# Altium PCB lab04.PcbDoc
Units mil, origin at the board's own origin, x right, y up, seen from the top; angles counter-clockwise.
Board outline 1387.8 x 1387.8 mil, 2 copper layers (Top Layer, Top, Bottom Layer, Bottom); 6 components, 8 nets, 26 pads, 0 vias.
Unrouted connection lines stored in the file: 1.
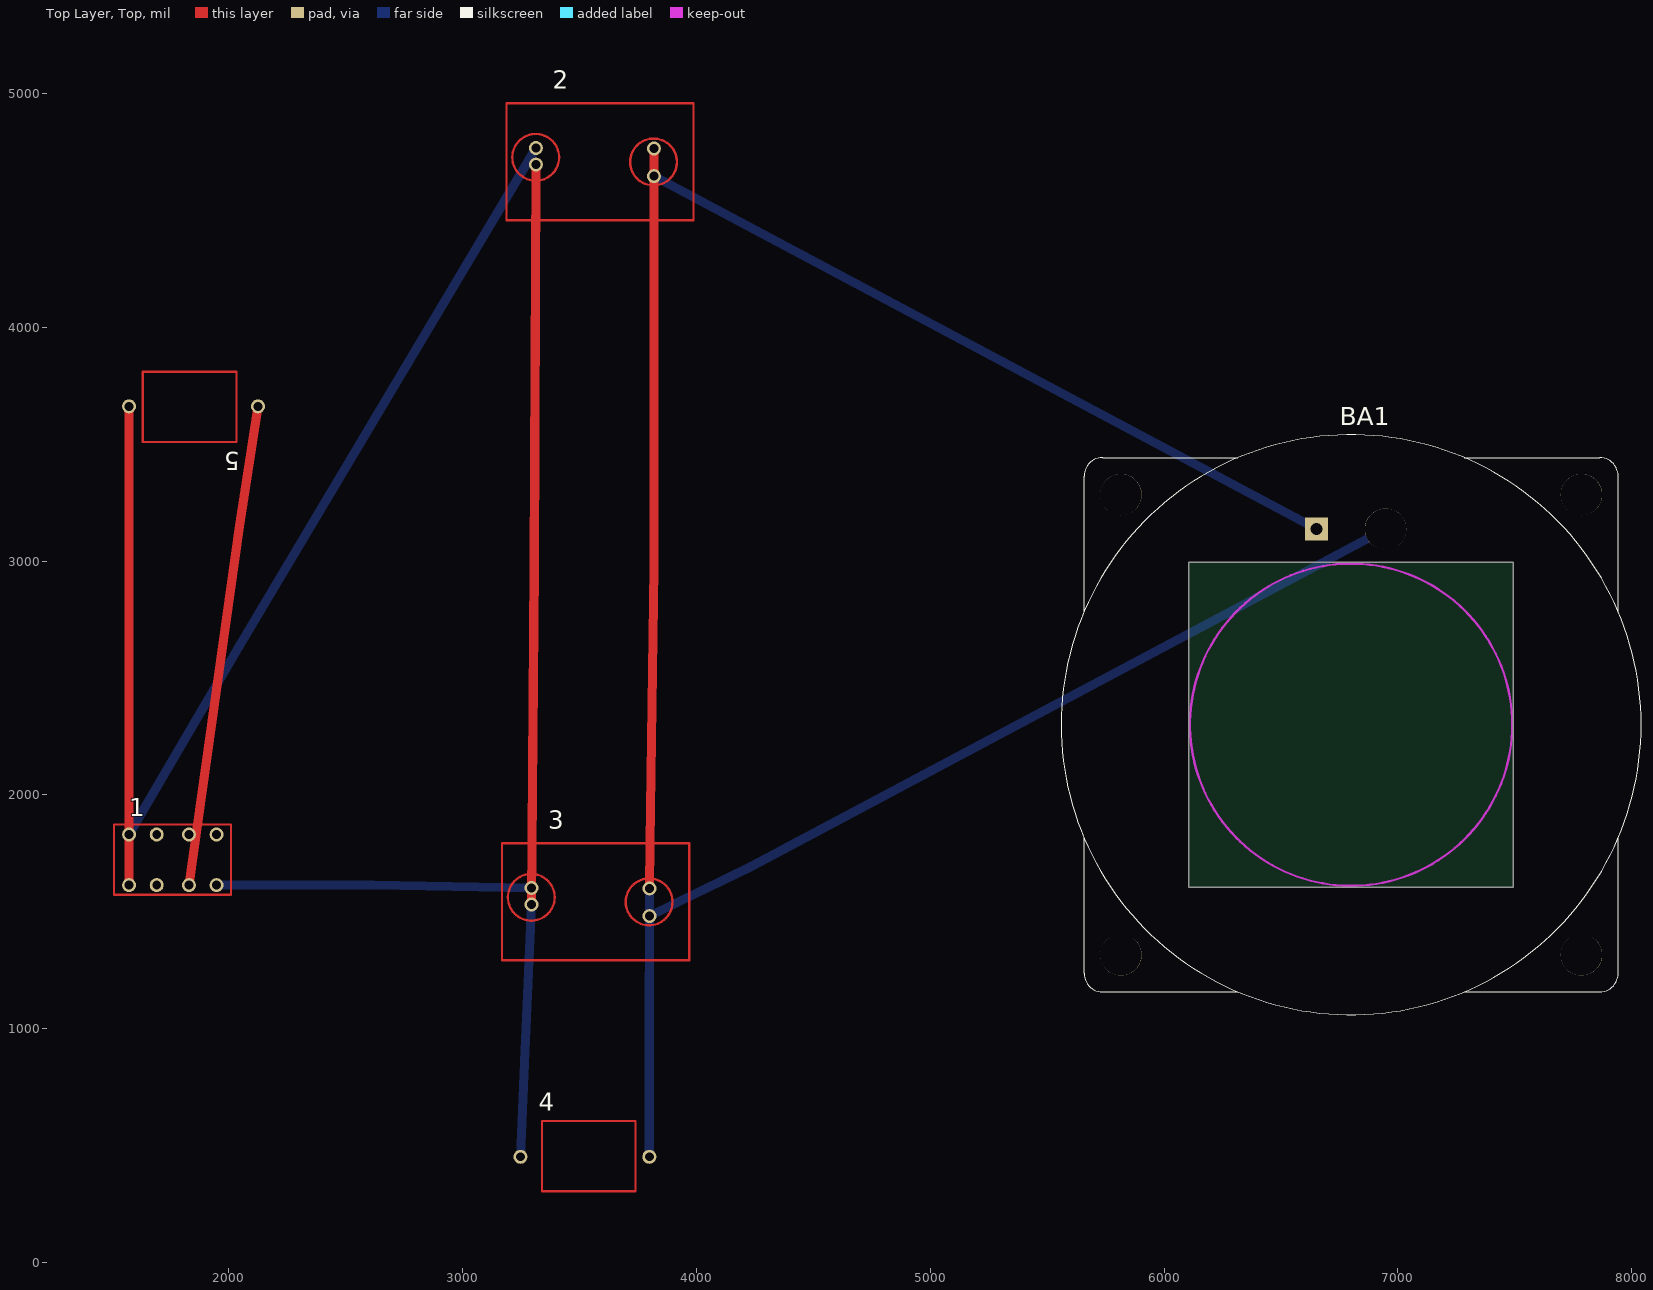
[diagram p0: Top Layer, Top view]
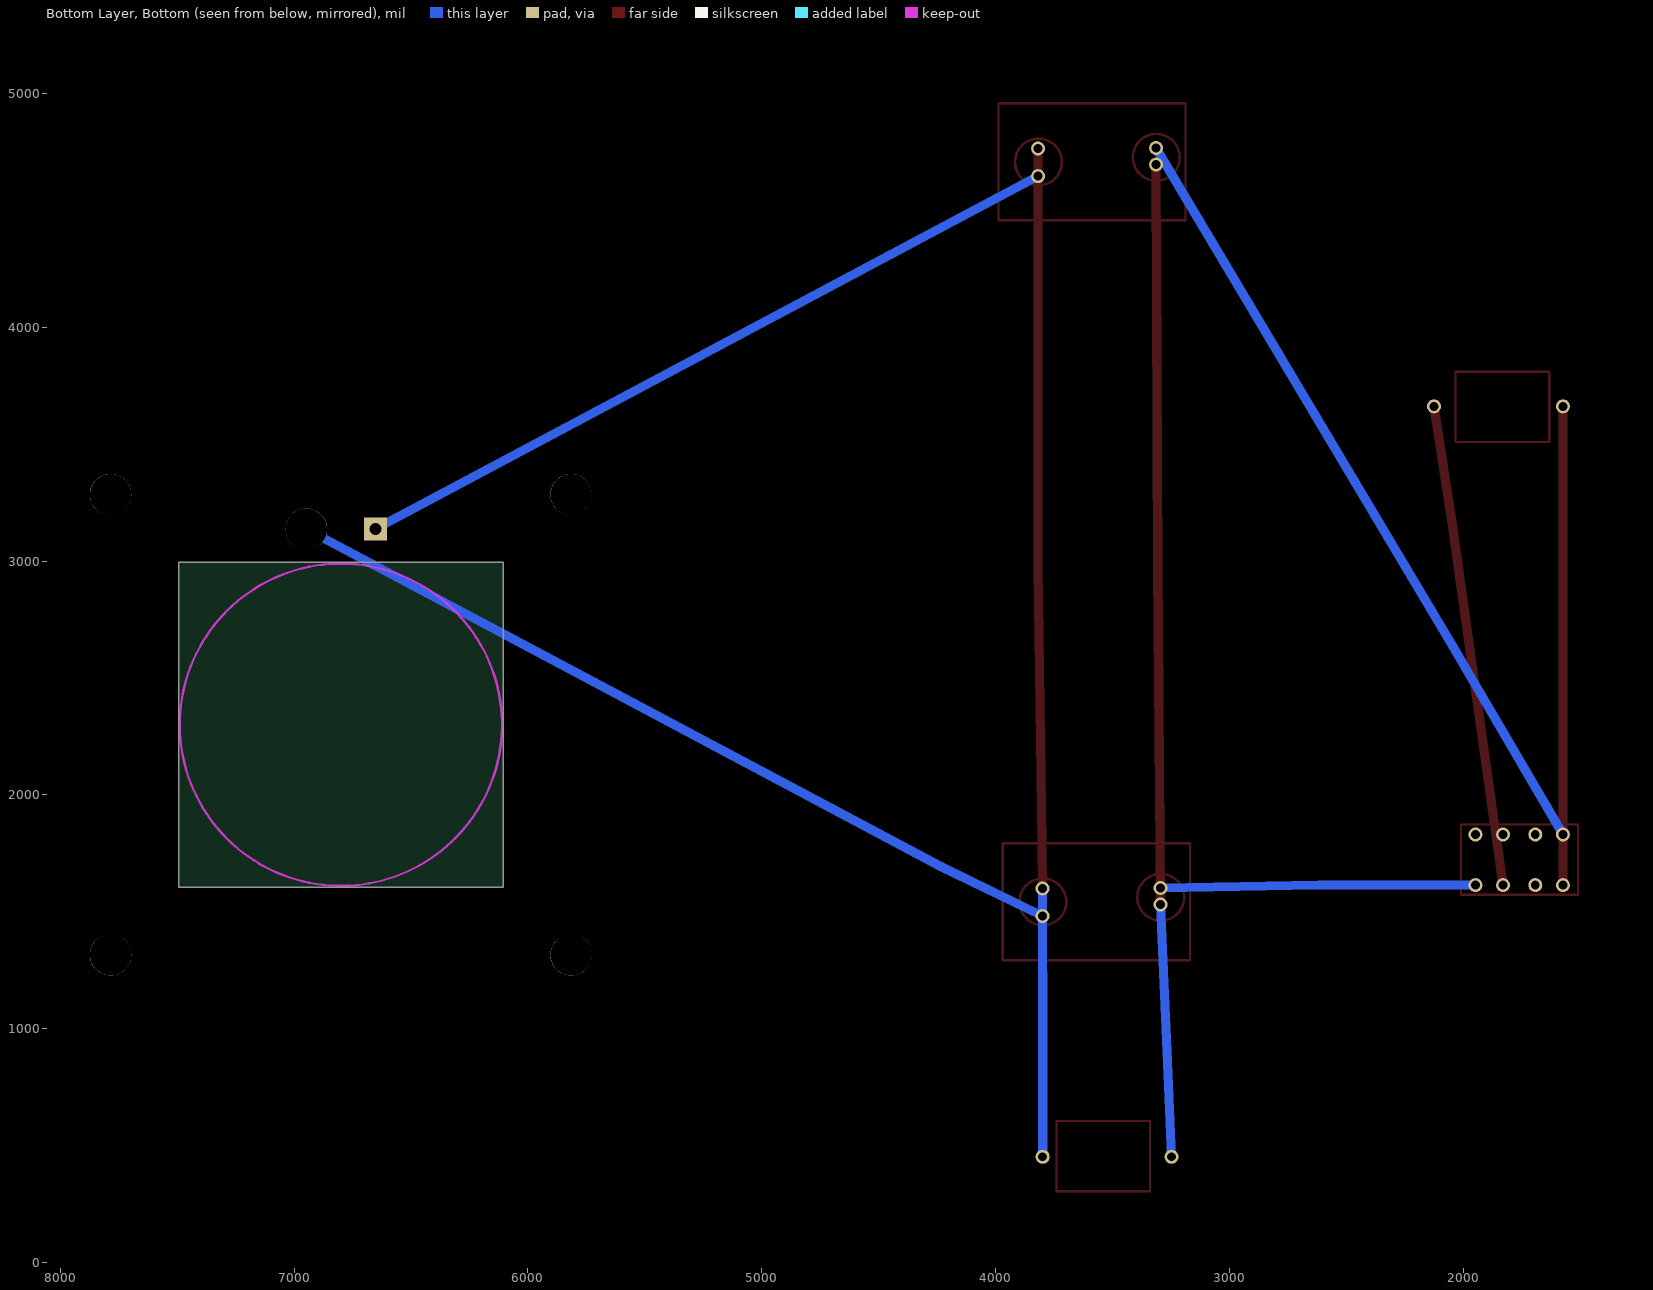
[diagram p1: Bottom Layer, Bottom view, seen from below]

## Layer stack, top to bottom
Top Solder, Top Mask: solder mask 0.4, Solder Resist, Dk 3.5
Top Layer, Top: signal copper 1.4
Dielectric 1: dielectric 12.6, FR-4, Dk 4.8
Bottom Layer, Bottom: signal copper 1.4
Bottom Solder, Bot Mask: solder mask 0.4, Solder Resist, Dk 3.5

## Board outline
6106.1,1606.12 7493.89,1606.12 7493.89,2993.91 6106.1,2993.91

## Design rules (kind name [scope] priority, off if disabled: settings)
Clearance [All] p1: gap=10 ignorepadtopadclearanceinfootprint=FALSE except(0: Arc-Hole Track-Hole SMDPad-Hole THPad-Hole Via-Hole Fill-Hole Poly-Hole Region-Hole Text-Hole; 12: Arc-Arc Arc-Track Arc-THPad Arc-Via Track-Track Track-THPad Track-Via THPad-THPad THPad-Via Via-Via)
PlaneClearance [All] p1: clearance=10
PolygonConnect [All] p1: connectstyle=Relief reliefconductorwidth=10 reliefentries=4 polygonreliefangle="90 Angle" airgapwidth=10
RoutingVias [All] p1: holewidth=28 width=50 viastyle="Through Hole" minholewidth=28 minwidth=50 maxholewidth=28 maxwidth=50
SolderMaskExpansion [All] p1: expansion=4 istentingtop=FALSE
Width [All] p1: maxlimit=10 minlimit=10 preferedwidth=10
29 further rules are at their usual default settings.

## Components (designator, comment, footprint, x,y, rotation, side; value= is the part's Value field where it differs from the comment)
1 "" DRV134P_DRV134C(Primary) 1574.8,1850.39 r0 top
2 "" PA150P_PA150(Primary) 3818.9,4763.78 r0 top
3 "" PA150P_PA150(Primary) 3800,1600 r0 top
4 "" PUP_PUC(Primary) 3248.03,452.76 r0 top
5 "" PUP2_PUC2(Primary) 2125.98,3661.42 r90 top
BA1 "" 0,25ГД-10 6800,2300 r0 top

## Footprints (in the part's own frame and the unit in brackets; to place one, negate y for a bottom-side part, rotate by r counter-clockwise, add the part's x,y. Pads: shape width x height; smd on the part's side, far side on the other; paste and mask are expansions set on the pad)
0,25ГД-10 [mm]
  rect 2.5x2.5 hole 1.3: 1(-3.75,21.25)
  round 4.5 hole 4.5: 2(3.75,21.25) 3(-25,25) 4(25,25) 5(25,-25) 6(-25,-25)
  Keep-Out Layer, Board circle w0.25: c0,0 r17.5
  silkscreen extent -31.5,-31.5 31.5,31.5
DRV134P_DRV134C(Primary) [mil]
  round 60 hole 38: 6(118.11,-19.69) 7(255.91,-19.69) 8(374.02,-19.69) A(374.02,-236.22) E(118.11,-236.22) G(255.91,-236.22) S(0,-236.22) T(0,-19.69)
  Top Layer, Top pour cut-out: -236.22,236.22 -236.22,-472.44 551.18,-472.44 551.18,236.22
PA150P_PA150(Primary) [mil]
  round 60 hole 38: E(0,-118.11) G(0,0) S(-504.72,-68.5) T(-504.72,2.36)
  Top Layer, Top circle w10: c-505.51,-37.8 r100
  Top Layer, Top circle w10: c-1.57,-57.48 r100
  Top Layer, Top pour cut-out: -767.72,413.39 -767.72,-531.5 255.91,-531.5 255.91,413.39
PUP2_PUC2(Primary) [mil]
  round 60 hole 38: E(0,0) S(0,551.18)
  Top Layer, Top pour cut-out: -354.33,-78.74 354.33,-78.74 354.33,629.92 -354.33,629.92
  Top Layer, Top lines w10: -152.76,492.13 147.24,492.13 147.24,92.13 -152.76,92.13 -152.76,492.13
PUP_PUC(Primary) [mil]
  round 60 hole 38: E(0,0) S(551.18,0)
  Top Layer, Top pour cut-out: -78.74,354.33 -78.74,-354.33 629.92,-354.33 629.92,354.33
  Top Layer, Top lines w10: 92.13,-147.24 492.13,-147.24 492.13,152.76 92.13,152.76 92.13,-147.24

## Nets (pads, with @x,y where several pads share a name; then routed paths per layer and width w, separated by ;. In a path a pad name is that pad's centre, name@x,y a point inside that pad or via, vN(x,y) a via of type N, cw(c..) or ccw(c..) an arc to the next point about the centre after c; other vN are vias at no path point)
NET00023: 3.E BA1.2 | length 3556.3
  Bottom Layer, Bottom w39.37: 3.E 4232.28,1692.91 BA1.2
NET00024: 2.E BA1.1 | length 3210.3
  Bottom Layer, Bottom w39.37: 2.E 4448.82,4311.02 BA1.1
NET00025: 2.S 3.S 4.E | length 4243.6
  Top Layer, Top w39.37: 3.S 3307.09,2972.44 2.S
  Bottom Layer, Bottom w39.37: 4.E 3267.72,905.51 3.S
NET00026: 2.G 3.G 4.S | length 9511.2
  Top Layer, Top w10: 3169.29,1292.91 3969.29,1292.91 3969.29,1792.91 3802.66,1792.91 3169.29,1792.91 3169.29,1292.91 ; 3188.19,4456.69 3818.9,4456.69 3988.19,4456.69 3988.19,4956.69 3188.19,4956.69 3188.19,4456.69
  Top Layer, Top w39.37: 3.G 3802.66,1792.91 3818.9,2972.44 3818.9,4456.69 2.G
  Bottom Layer, Bottom w39.37: 4.S 3799.21,885.83 3.G
NET00027: 1.T 2.T | length 3412.1
  Bottom Layer, Bottom w39.37: 1.T 2047.24,2637.8 2.T
NET00028: 1.A 3.T | length 2946.6
  Top Layer, Top w10: 1510.24,1573.23 2010.24,1573.23 2010.24,1873.23 1510.24,1873.23 1510.24,1573.23
  Bottom Layer, Bottom w39.37: 1.A 2618.11,1614.17 3.T
NET00029: 1.S 5.S | length 2047.2
  Top Layer, Top w39.37: 1.S 5.S
NET00030: 1.G 5.E | length 2068.5
  Top Layer, Top w39.37: 1.G 2047.24,3149.61 5.E
pads on no net: 1.6 1.7 1.8 1.E BA1.3 BA1.4 BA1.5 BA1.6